# EAGLE board schaltplan (EAGLE 6.4)
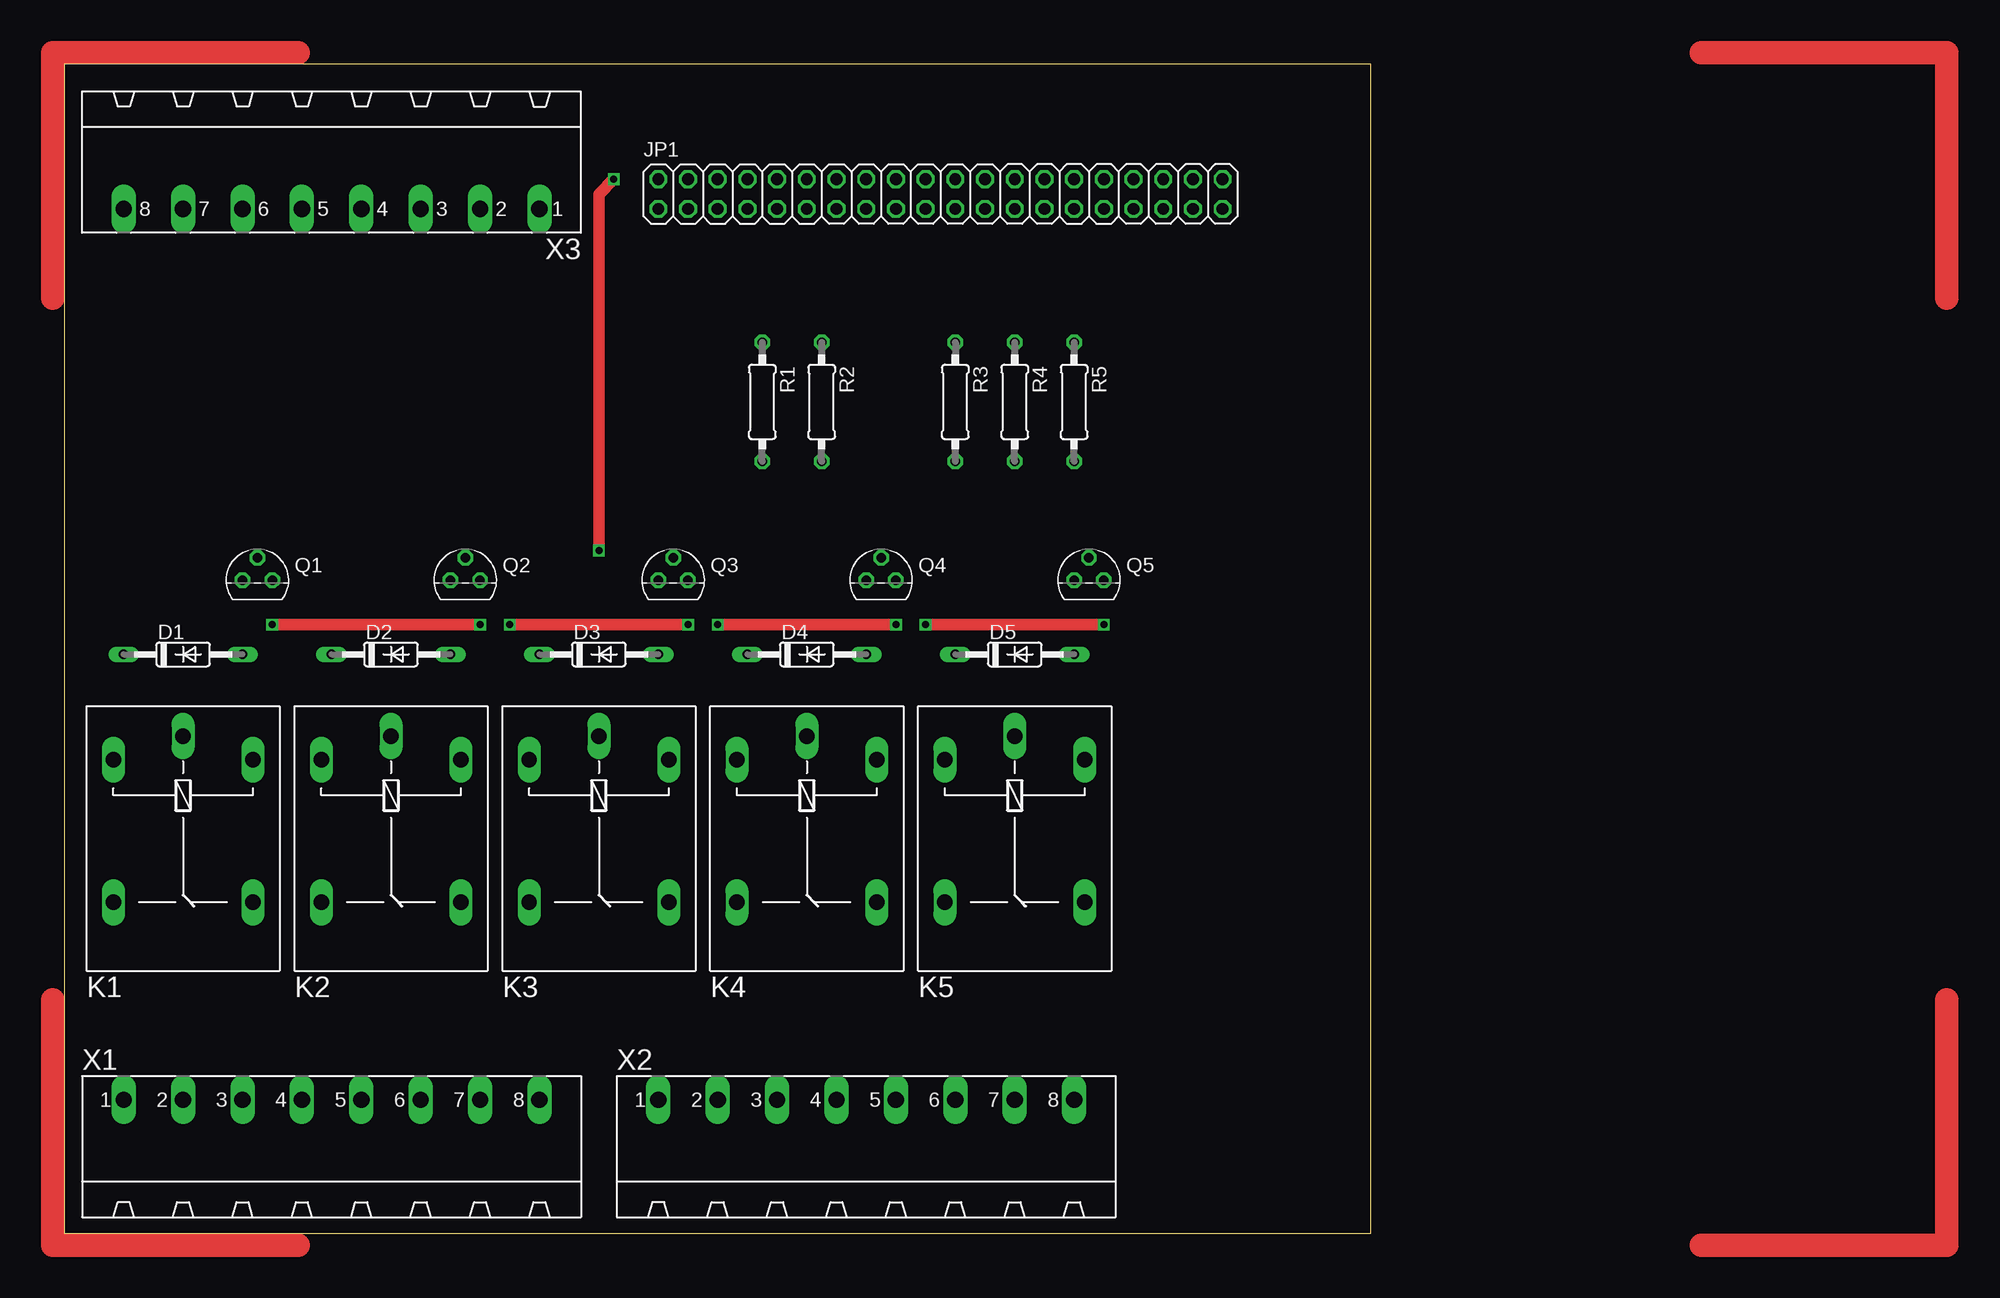
[diagram p0: board, top side]
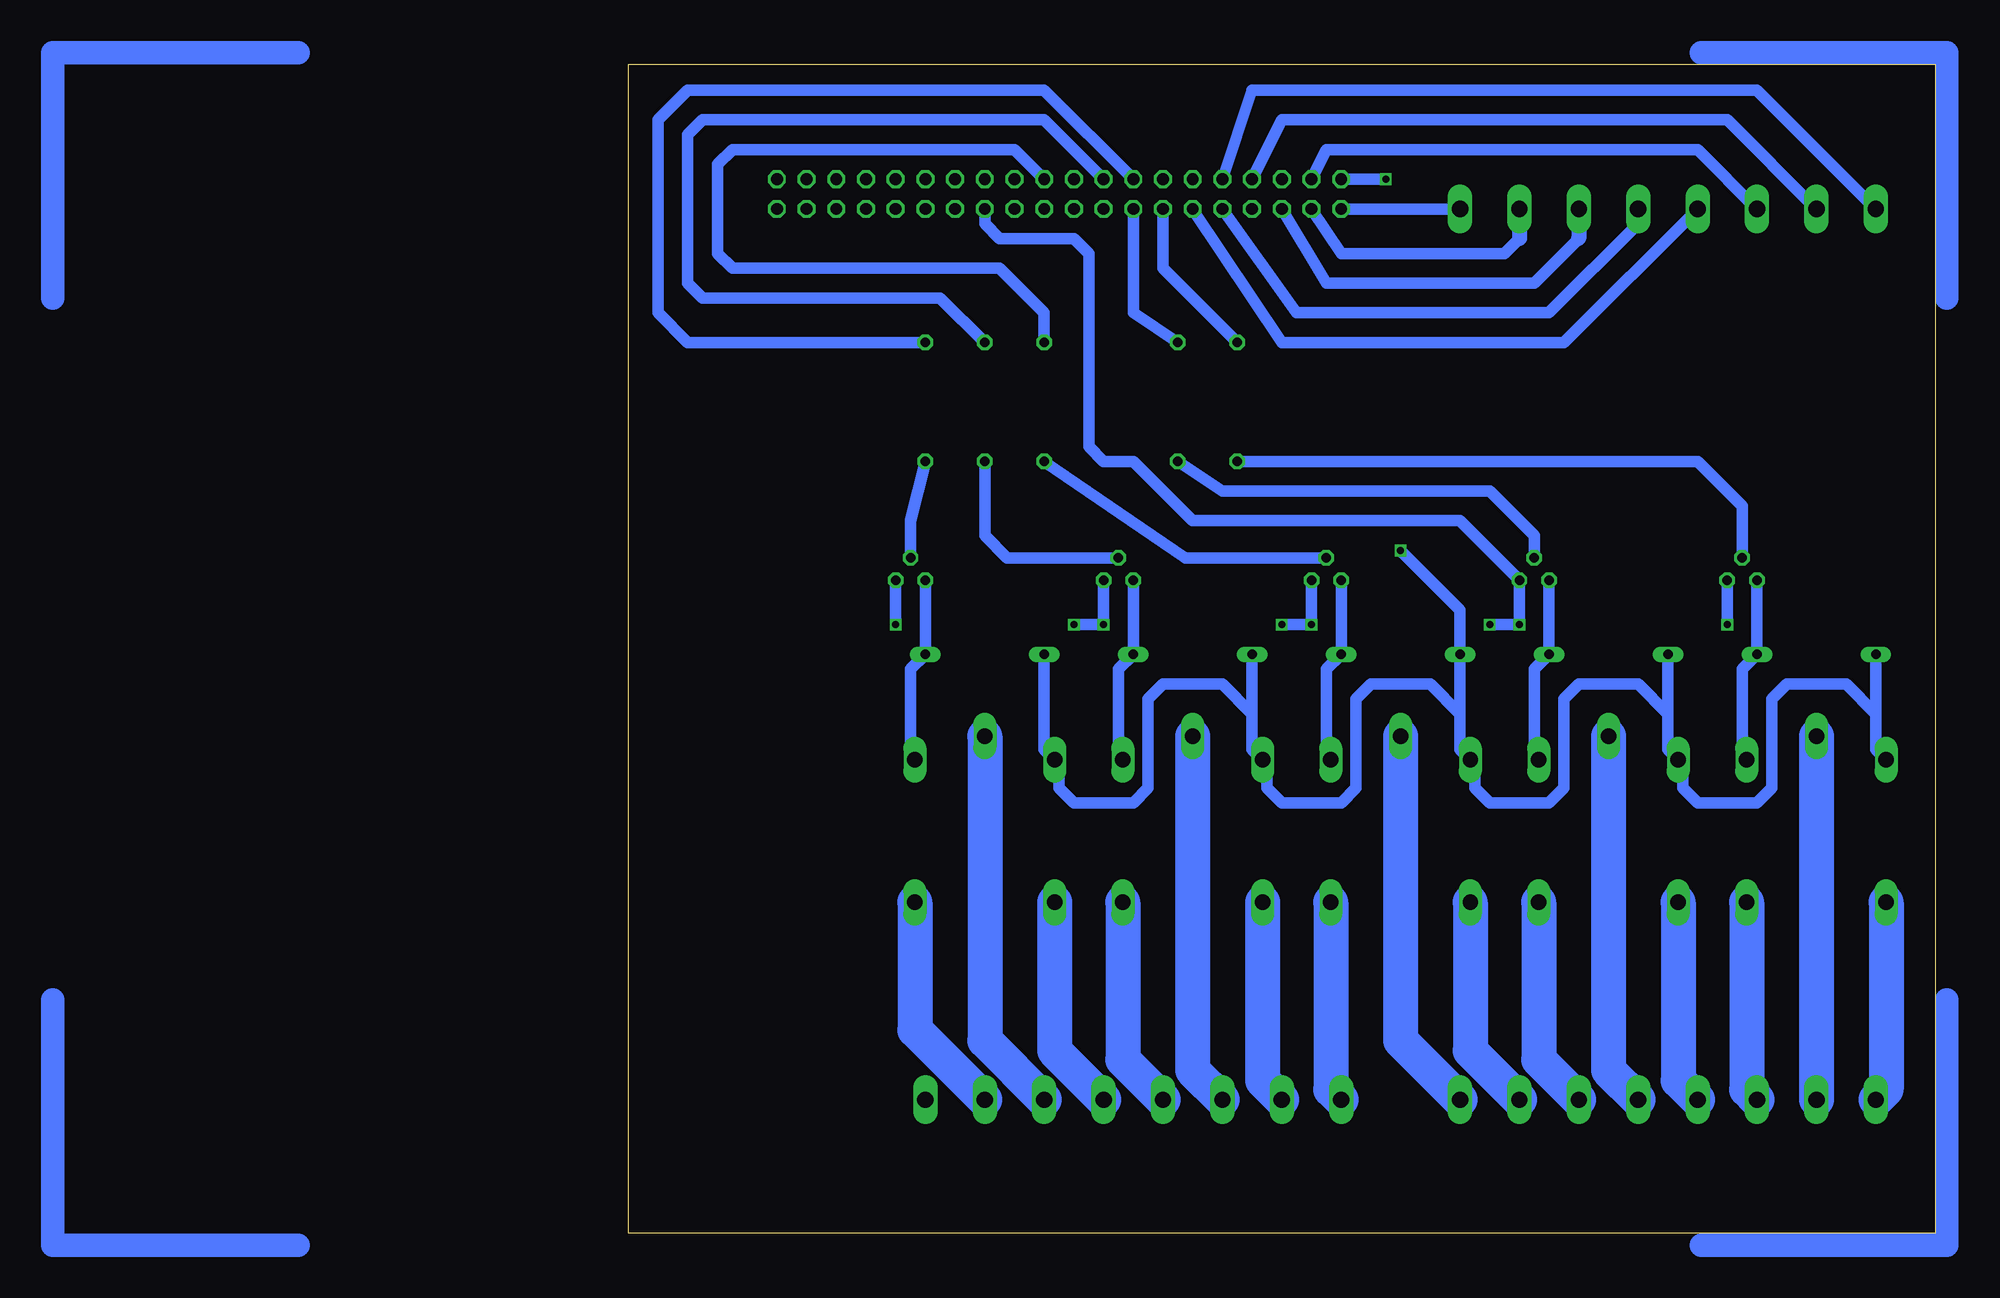
[diagram p1: board, bottom side, seen from below]

Size 111.74 x 100 mm. Coordinates in mm from the lower left corner, seen from the top.
Outline: 0,0 111.74,0 111.74,100 0,100 0,0
Copper layers (1*16): Top 0.035mm / dielectric 1.5mm / Bottom 0.035mm
Design rules "default": minimum track width 10mil, minimum drill 24mil, track to track 8mil, track to pad 8mil, pad to pad 8mil, via to via 8mil, smd to smd 8mil, copper to edge 40mil, drill to drill 8mil, minimum pad ring 10mil, minimum via ring 8mil, stop-mask expansion 4mil, vias tented up to drill 0mil, thermal gap 10mil

## Footprints (pad centres in the part's own frame; a part is rotated, then mirrored left to right if it is on the bottom)
DO35-10 = drill 0.813 long: A 5.08,0; C -5.08,0
2X20 = drill 1.016 octagon: 1 -24.13,-1.27; 2 -24.13,1.27; 3 -21.59,-1.27; 4 -21.59,1.27; 5 -19.05,-1.27; 6 -19.05,1.27; 7 -16.51,-1.27; 8 -16.51,1.27; 9 -13.97,-1.27; 10 -13.97,1.27; 11 -11.43,-1.27; 12 -11.43,1.27; 13 -8.89,-1.27; 14 -8.89,1.27; 15 -6.35,-1.27; 16 -6.35,1.27; 17 -3.81,-1.27; 18 -3.81,1.27; 19 -1.27,-1.27; 20 -1.27,1.27; 21 1.27,-1.27; 22 1.27,1.27; 23 3.81,-1.27; 24 3.81,1.27; 25 6.35,-1.27; 26 6.35,1.27; 27 8.89,-1.27; 28 8.89,1.27; 29 11.43,-1.27; 30 11.43,1.27; 31 13.97,-1.27; 32 13.97,1.27; 33 16.51,-1.27; 34 16.51,1.27; 35 19.05,-1.27; 36 19.05,1.27; 37 21.59,-1.27; 38 21.59,1.27; 39 24.13,-1.27; 40 24.13,1.27
G5LE = drill 1.321 long: 1 -7.493,-5.969; 2 -7.493,5.969; O 4.699,5.969; P -9.525,0; S 4.699,-5.969
TO92 = drill 0.813 octagon: 1 1.27,0; 2 0,1.905; 3 -1.27,0
0207/10 = drill 0.813 octagon: 1 -5.08,0; 2 5.08,0
MSTBA8 = drill 1.397 long: 1 -17.78,5.08; 2 -12.7,5.08; 3 -7.62,5.08; 4 -2.54,5.08; 5 2.54,5.08; 6 7.62,5.08; 7 12.7,5.08; 8 17.78,5.08

## Placement (x,y rotation side)
D1  1N4148  [DO35-10]  10.16,49.53 0 top
D2  1N4148  [DO35-10]  27.94,49.53 0 top
D3  1N4148  [DO35-10]  45.72,49.53 0 top
D4  1N4148  [DO35-10]  63.5,49.53 0 top
D5  1N4148  [DO35-10]  81.28,49.53 0 top
JP1  [2X20]  74.93,88.9 0 top
K1  G5LA1E5DC  [G5LE]  10.16,33.02 270 top
K2  G5LA1E5DC  [G5LE]  27.94,33.02 270 top
K3  G5LA1E5DC  [G5LE]  45.72,33.02 270 top
K4  G5LA1E5DC  [G5LE]  63.5,33.02 270 top
K5  G5LA1E5DC  [G5LE]  81.28,33.02 270 top
Q1  BC547B  [TO92]  16.51,55.88 0 top
Q2  BC547B  [TO92]  34.29,55.88 0 top
Q3  BC547B  [TO92]  52.07,55.88 0 top
Q4  BC547B  [TO92]  69.85,55.88 0 top
Q5  BC547B  [TO92]  87.63,55.88 0 top
R1  4k7  [0207/10]  59.69,71.12 270 top
R2  4k7  [0207/10]  64.77,71.12 270 top
R3  4k7  [0207/10]  76.2,71.12 270 top
R4  4k7  [0207/10]  81.28,71.12 270 top
R5  4k7  [0207/10]  86.36,71.12 270 top
X1  MSTBA8  [MSTBA8]  22.86,6.35 0 top
X2  MSTBA8  [MSTBA8]  68.58,6.35 0 top
X3  MSTBA8  [MSTBA8]  22.86,92.71 180 top

## Library data of the parts
D1-D5 = diode
JP1 = pinhead
K1-K5 = relay; OC_FARNELL: unknown; OC_NEWARK: unknown
Q1-Q5 = transistor-npn
R1-R5 = rcl
X1-X3 = con-phoenix-508; MF: FARNELL; MPN: 1757307; OC_FARNELL: 3705225; OC_NEWARK: 71C4166

## Nets
0V: JP1.25 Q1.1 Q2.1 Q3.1 Q4.1 Q5.1
+5V: D1.C D2.C D3.C D4.C D5.C JP1.2 K1.1 K2.1 K3.1 K4.1 K5.1
N$1: D1.A K1.2 Q1.3
N$2: D2.A K2.2 Q2.3
N$3: D3.A K3.2 Q3.3
N$4: D4.A K4.2 Q4.3
N$5: D5.A K5.2 Q5.3
N$6: JP1.1 X3.1
N$7: Q2.2 R2.2
N$8: Q3.2 R3.2
N$9: Q4.2 R4.2
N$10: Q5.2 R5.2
N$11: K4.P X2.3
N$12: K1.P X1.2
N$13: K1.O X1.3
N$14: K1.S X1.1
N$15: K2.P X1.5
N$16: K2.O X1.6
N$17: K2.S X1.4
N$18: K3.P X1.8
N$19: K3.O X2.1
N$20: K3.S X1.7
N$21: K4.O X2.4
N$22: K4.S X2.2
N$23: K5.P X2.6
N$24: K5.S X2.5
N$25: K5.O X2.7
N$26: Q1.2 R1.2
N$27: JP1.3 X3.2
N$28: JP1.5 X3.3
N$29: JP1.9 X3.4
N$30: JP1.11 X3.5
N$31: JP1.4 X3.6
N$32: JP1.8 X3.7
N$33: JP1.10 X3.8
RASPI_GPIO_22: JP1.15 R2.1
RASPI_GPIO_23: JP1.16 R5.1
RASPI_GPIO_24: JP1.18 R4.1
RASPI_GPIO_25: JP1.22 R3.1
RASPI_GPIO_27: JP1.13 R1.1

## Tracks (layer width: path | path; a pad name or v marks a point on that pad's centre or on a via)
0V  (via drill 0.6)
  Top 1: v17.78,52.07 v35.56,52.07 | v53.34,52.07 v38.1,52.07 | v71.12,52.07 v55.88,52.07 | v88.9,52.07 v73.66,52.07
  Bottom 1: JP1.25 81.28,86.36 80.01,85.09 73.66,85.09 72.39,83.82 72.39,67.31 71.12,66.04 68.58,66.04 63.5,60.96 40.64,60.96 Q2.1 v35.56,52.07 v38.1,52.07 | Q1.1 v17.78,52.07 | Q3.1 v53.34,52.07 v55.88,52.07 | Q4.1 v71.12,52.07 v73.66,52.07 | Q5.1 v88.9,52.07
+5V  (via drill 0.6)
  Top 1: v46.99,90.17 45.72,88.9 v45.72,58.42
  Bottom 0.5: 40.64,41.4 40.64,43.18
  Bottom 1: 40.64,44.45 D3.C 40.64,53.34 v45.72,58.42 | D5.C 76.2,41.4 K5.1 74.93,40.13 74.93,38.1 73.66,36.83 68.58,36.83 67.31,38.1 67.31,45.72 66.04,46.99 60.96,46.99 58.42,44.45 | D1.C 5.08,44.45 | K1.1 5.08,41.4 5.08,44.45 | 5.08,44.45 7.62,46.99 12.7,46.99 13.97,45.72 13.97,38.1 15.24,36.83 20.32,36.83 21.59,38.1 21.59,40.13 K2.1 22.86,41.4 22.86,44.45 | D2.C 22.86,44.45 | 22.86,44.45 25.4,46.99 30.48,46.99 31.75,45.72 31.75,38.1 33.02,36.83 38.1,36.83 39.37,38.1 39.37,40.13 K3.1 40.64,41.4 40.64,44.45 | 40.64,44.45 43.18,46.99 48.26,46.99 49.53,45.72 49.53,38.1 50.8,36.83 55.88,36.83 57.15,38.1 57.15,40.13 K4.1 58.42,41.4 58.42,44.45 | D4.C 58.42,44.45 | JP1.2 v46.99,90.17
N$1
  Bottom 1: K1.2 16.51,40.89 16.51,48.26 D1.A Q1.3
N$2
  Bottom 1: K2.2 34.29,40.89 34.29,48.26 D2.A Q2.3
N$3
  Bottom 1: K3.2 52.07,40.89 52.07,48.26 D3.A Q3.3
N$4
  Bottom 1: K4.2 69.85,40.89 69.85,48.26 D4.A Q4.3
N$5
  Bottom 1: K5.2 87.63,40.89 87.63,48.26 D5.A Q5.3
N$6
  Bottom 1: X3.1 JP1.1
N$7
  Bottom 1: Q2.2 34.29,59.69 38.1,63.5 60.96,63.5 R2.2
N$8
  Bottom 1: Q3.2 64.14,57.78 R3.2
N$9
  Bottom 1: Q4.2 79.38,57.78 81.28,59.69 R4.2
N$10
  Bottom 1: R5.2 87.63,60.96 Q5.2
N$11
  Bottom 3: K4.P 63.5,13.97 X2.3
N$12
  Bottom 3: K1.P X1.2
N$13
  Bottom 3: K1.O 16.13,12.32 X1.3
N$14
  Bottom 3: K1.S 4.19,12.32 X1.1
N$15
  Bottom 3: K2.P 27.94,13.97 X1.5
N$16
  Bottom 3: K2.O 33.91,14.86 X1.6
N$17
  Bottom 3: K2.S 21.97,13.08 X1.4
N$18
  Bottom 3: K3.P 45.72,16.51 X1.8
N$19
  Bottom 3: K3.O 51.69,12.32 X2.1
N$20
  Bottom 3: K3.S 39.75,15.62 X1.7
N$21
  Bottom 3: K4.O 69.47,14.86 X2.4
N$22
  Bottom 3: K4.S 57.53,13.08 X2.2
N$23
  Bottom 3: K5.P 81.28,16.51 X2.6
N$24
  Bottom 3: K5.S 75.31,15.62 X2.5
N$25
  Bottom 3: K5.O 87.25,17.4 X2.7
N$26
  Bottom 1: Q1.2 16.51,62.23 20.32,66.04 R1.2
N$27
  Bottom 1: 35.56,85.09 36.83,83.82 50.8,83.82 JP1.3
  Bottom 1.27: X3.2 35.56,85.09
N$28
  Bottom 1: 30.48,85.09 34.29,81.28 52.07,81.28 JP1.5
  Bottom 1.27: X3.3 30.48,85.09
N$29
  Bottom 1: 25.4,86.36 33.02,78.74 54.61,78.74 JP1.9
  Bottom 1.27: X3.4 25.4,86.36
N$30
  Bottom 1: X3.5 31.75,76.2 55.88,76.2 JP1.11
N$31
  Bottom 1: X3.6 20.32,92.71 52.07,92.71 JP1.4
N$32
  Bottom 1: X3.7 17.78,95.25 55.88,95.25 JP1.8
N$33
  Bottom 1: X3.8 15.24,97.79 58.42,97.79 JP1.10
N$34
  Top 2: 20,-1 -1,-1 -1,20
N$35
  Top 2: 140,-1 161,-1 161,20
N$36
  Top 2: 20,101 -1,101 -1,80
N$37
  Top 2: 161,80 161,101 140,101
N$38
  Bottom 2: 20,-1 -1,-1 -1,20
N$39
  Bottom 2: 140,-1 161,-1 161,20
N$40
  Bottom 2: 20,101 -1,101 -1,80
N$41
  Bottom 2: 161,80 161,101 140,101
RASPI_GPIO_22
  Bottom 1: R2.1 68.58,78.74 JP1.15
RASPI_GPIO_23
  Bottom 1: JP1.16 76.2,97.79 106.68,97.79 109.22,95.25 109.22,78.74 106.68,76.2 R5.1
RASPI_GPIO_24
  Bottom 1: JP1.18 76.2,95.25 105.41,95.25 106.68,93.98 106.68,81.28 105.41,80.01 85.09,80.01 R4.1
RASPI_GPIO_25
  Bottom 1: JP1.22 78.74,92.71 102.87,92.71 104.14,91.44 104.14,83.82 102.87,82.55 80.01,82.55 76.2,78.74 R3.1
RASPI_GPIO_27
  Bottom 1: R1.1 66.04,82.55 JP1.13